# Altium PCB main.PcbDoc
Units mm, origin at the board's own origin, x right, y up, seen from the top; angles counter-clockwise.
Board outline 241.1 x 65 mm, 2 copper layers (Top Layer, Bottom Layer); 26 components, 20 nets, 89 pads, 10 vias.
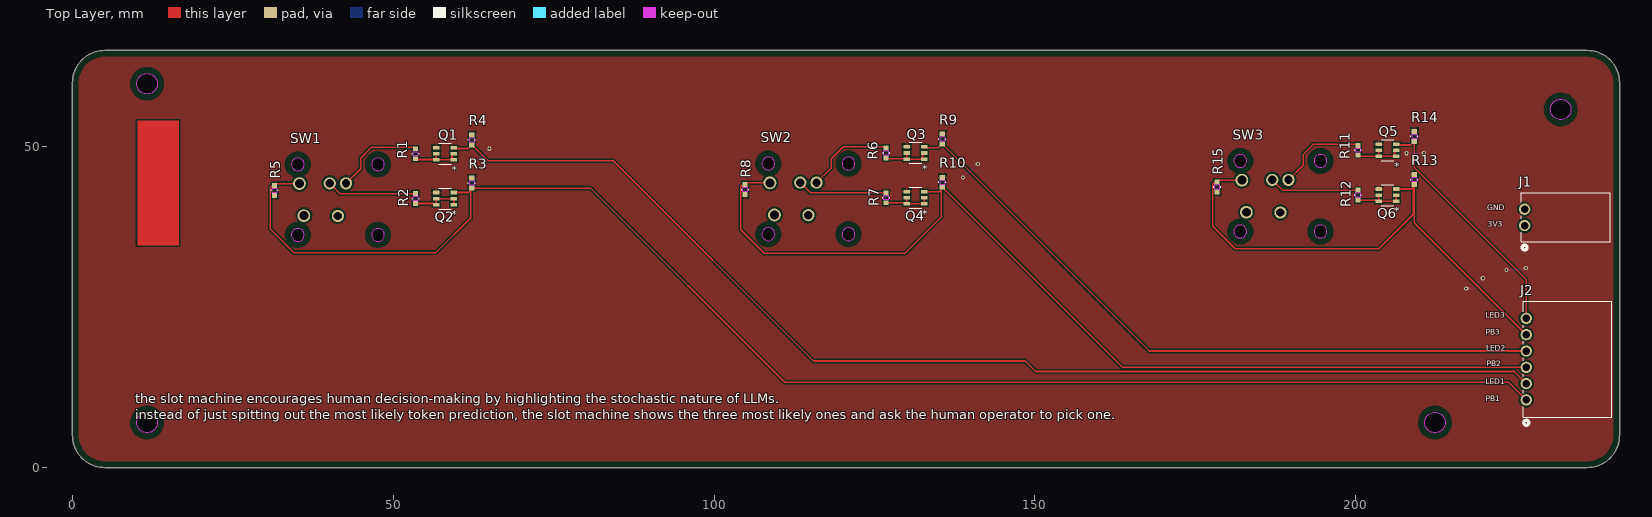
[diagram p0: Top Layer view]
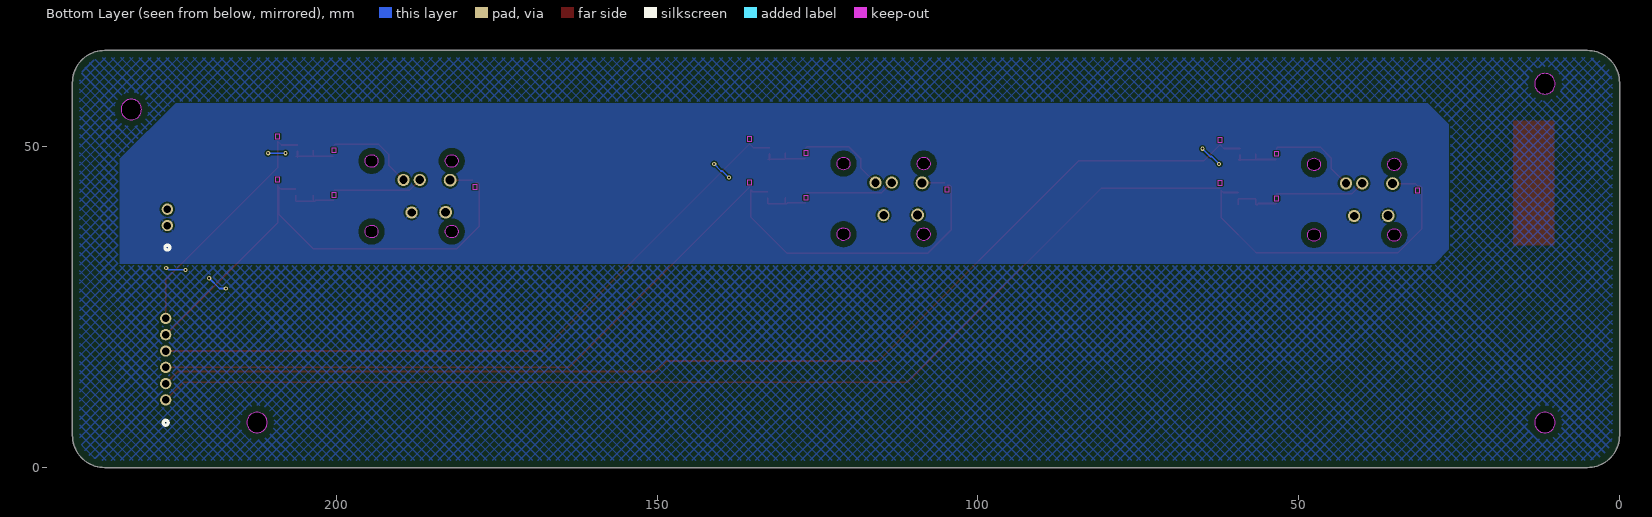
[diagram p1: Bottom Layer view, seen from below]
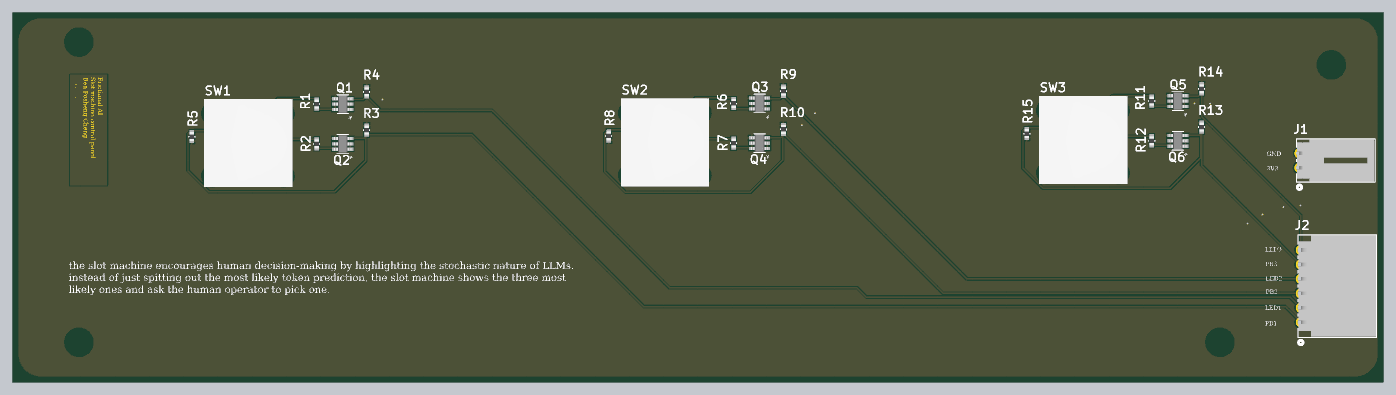
[diagram p2: 3D render of the assembled board from above, using the file's embedded part models]

## Layer stack, top to bottom
Top Solder: solder mask 0.0102, Solder Resist, Dk 3.5
Top Layer: signal copper 0.0356
Dielectric 1: dielectric 0.32, FR-4, Dk 4.8
Bottom Layer: signal copper 0.0356
Bottom Solder: solder mask 0.0102, Solder Resist, Dk 3.5

## Board outline
0,5 0,60 cw(c5,60) 5,65 236.1,65 cw(c236.1,60) 241.1,60 241.1,5 cw(c236.1,5) 236.1,0 5,0 cw(c5,5)
cut-out: 231.931,54.212 cw(c231.931,55.812) 230.331,55.812 cw(c231.931,55.812) 231.931,57.412 cw(c231.931,55.812) 233.531,55.812 cw(c231.931,55.812)
cut-out: 11.631,58.212 cw(c11.631,59.812) 10.031,59.812 cw(c11.631,59.812) 11.631,61.412 cw(c11.631,59.812) 13.231,59.812 cw(c11.631,59.812)
cut-out: 212.331,5.412 cw(c212.331,7.012) 210.731,7.012 cw(c212.331,7.012) 212.331,8.612 cw(c212.331,7.012) 213.931,7.012 cw(c212.331,7.012)
cut-out: 11.631,5.412 cw(c11.631,7.012) 10.031,7.012 cw(c11.631,7.012) 11.631,8.612 cw(c11.631,7.012) 13.231,7.012 cw(c11.631,7.012)

## Design rules (kind name [scope] priority, off if disabled: settings)
BoardOutlineClearance [All] p1: gap=1 ignorepadtopadclearanceinfootprint=FALSE
Clearance [All] p1: gap=0.2 ignorepadtopadclearanceinfootprint=TRUE except(0.1: Track-Track Track-SMDPad; 0.15: SMDPad-SMDPad; 0.28: Track-THPad Track-Hole; 0.3: THPad-Fill THPad-Poly THPad-Region; 0.45: THPad-THPad)
HoleSize [All] p1: absolutevalues=TRUE maxlimit=6.3 minlimit=0.15 maxpercent=80.000 minpercent=20.000
MinimumAnnularRing [not isvia] p1: minimumring=0.3
MinimumSolderMaskSliver [All] p1: minsoldermaskwidth=0.1
PlaneClearance [All] p1: clearance=0.3
PlaneConnect [All] p1: pad.planeconnectstyle=Relief pad.reliefexpansion=0.2 pad.reliefentries=4 pad.reliefconductorwidth=0.3 pad.reliefairgap=0.3 via.planeconnectstyle=Direct via.reliefexpansion=0.508 via.reliefentries=4 via.reliefconductorwidth=0.254 via.reliefairgap=0.254
PolygonConnect [All] p1: thpad.connectstyle=Relief thpad.reliefconductorwidth=0.254 thpad.reliefentries=4 thpad.polygonreliefangle="90 Angle" thpad.airgapwidth=0.254 thpad.conductorbypadedge=TRUE thpad.mindistance=0.381 thpad.enablemindistance=FALSE smdpad.connectstyle=Relief smdpad.reliefconductorwidth=0.254 smdpad.reliefentries=4 smdpad.polygonreliefangle="90 Angle" smdpad.airgapwidth=0.254 smdpad.conductorbypadedge=TRUE smdpad.mindistance=0.381 smdpad.enablemindistance=FALSE via.connectstyle=Direct via.reliefconductorwidth=0.254 via.reliefentries=4 via.polygonreliefangle="90 Angle" via.airgapwidth=0.254
RoomDefinition PushButton3 [InComponentClass('PushButton3')] p1: confinementstyle=ConfineIn formatcopy=TRUE lockcomponents=FALSE outline 210.211,53.381 177.318,53.381 177.318,34.458 210.211,34.458
RoomDefinition PushButton2 [InComponentClass('PushButton2')] p2: confinementstyle=ConfineIn formatcopy=TRUE lockcomponents=FALSE outline 136.562,52.968 103.796,52.968 103.796,34.045 136.562,34.045
RoomDefinition PushButton1 [InComponentClass('PushButton1')] p3: confinementstyle=ConfineIn formatcopy=TRUE lockcomponents=FALSE outline 30.486,34.043 63.379,34.043 63.379,52.839 30.486,52.839
RoutingVias [All] p1: holewidth=0.33 width=0.66 viastyle="Through Hole" minholewidth=0.3 minwidth=0.5 maxholewidth=0.45 maxwidth=1.27
SilkToSilkClearance [All] p1: silktosilkclearance=0
SilkToSolderMaskClearance [IsPad] p1: minsilkscreentomaskgap=0.15 clearancetoexposedcopper=FALSE
SolderMaskExpansion SolderMaskExpansionVia [IsVia] p1: expansion=0 istentingtop=TRUE
SolderMaskExpansion [All] p2: expansion=0.05 istentingtop=FALSE
SupplyNets "Schematic Supply Nets_3" [InNet('3V3')] p1: voltage=0.000
SupplyNets "Schematic Supply Nets" [InNet('GND')] p2: voltage=0.000
Width [All] p1: maxlimit=1 minlimit=0.1 preferedwidth=0.2
24 further rules are at their usual default settings.

## Classes and differential pairs
component class PushButton3: Q5 Q6 R11 R12 R13 R14 R15 SW3
component class PushButton2: Q3 Q4 R6 R7 R8 R9 R10 SW2
component class PushButton1: Q1 Q2 R1 R2 R3 R4 R5 SW1

## Components (designator, comment, footprint, x,y, rotation, side; value= is the part's Value field where it differs from the comment)
J1 "705530001" CONN_705530001_02_MOL 226.314,37.719 r90 top
J2 "705530110" CONN_705530005_06_MOL 226.568,10.541 r90 top
Q1 "STT6N3LLH6" SOT_6N3LLH6_STM 58.045,48.902 r180 top
Q2 "STT6N3LLH6" SOT_6N3LLH6_STM 58.045,41.917 r180 top
Q3 "STT6N3LLH6" SOT_6N3LLH6_STM 131.372,49.025 r180 top
Q4 "STT6N3LLH6" SOT_6N3LLH6_STM 131.372,42.04 r180 top
Q5 "STT6N3LLH6" SOT_6N3LLH6_STM 204.925,49.442 r180 top
Q6 "STT6N3LLH6" SOT_6N3LLH6_STM 204.925,42.457 r180 top
R1 "55" RC0603N_YAG 53.473,48.902 r90 top
R2 "55" RC0603N_YAG 53.473,41.917 r90 top
R3 "10k" RC0603N_YAG 62.236,44.33 r90 top
R4 "10k" RC0603N_YAG 62.236,51.061 r90 top
R5 "10k" RC0603N_YAG 31.502,43.187 r270 top
R6 "55" RC0603N_YAG 126.8,49.025 r90 top
R7 "55" RC0603N_YAG 126.8,42.04 r90 top
R8 "10k" RC0603N_YAG 104.829,43.31 r270 top
R9 "10k" RC0603N_YAG 135.563,51.184 r90 top
R10 "10k" RC0603N_YAG 135.563,44.453 r90 top
R11 "55" RC0603N_YAG 200.353,49.442 r90 top
R12 "55" RC0603N_YAG 200.353,42.457 r90 top
R13 "10k" RC0603N_YAG 209.116,44.87 r90 top
R14 "10k" RC0603N_YAG 209.116,51.601 r90 top
R15 "10k" RC0603N_YAG 178.382,43.727 r270 top
SW1 "LP6OA1ASRY" LP6 34.114,35.247 r0 top
SW2 "LP6OA1ASRY" LP6 107.441,35.37 r0 top
SW3 "LP6OA1ASRY" LP6 180.995,35.787 r0 top

## Footprints (in the part's own frame and the unit in brackets; to place one, negate y for a bottom-side part, rotate by r counter-clockwise, add the part's x,y. Pads: shape width x height; smd on the part's side, far side on the other; paste and mask are expansions set on the pad)
CONN_705530001_02_MOL [mil]
  round 69.61 / inner round 60 / far side round 69.61 hole 46 paste-99999 mask+0: 1(0,0) 2(100,0)
  silkscreen extent -150,-525 200,20, body extent -95,-520 195,15, height 272
CONN_705530005_06_MOL [mil]
  round 69.61 hole 46 paste-99999 mask+0: 1(0,0) 2(100,0) 3(200,0) 4(300,0) 5(400,0) 6(500,0)
  silkscreen extent -155,-525 605,20, body extent -100,-520 600,15, height 272
LP6 [mm]
  round 2 hole 1.4: 1(1.25,9) 2(1.95,4)
  round 1.9 hole 1.3: L1(8.52,9.04) L2(5.98,9.04) LC(7.25,3.96)
  Keep-Out Layer board cut-out: 0,1 0.076,0.617 0.293,0.293 0.617,0.076 1,0 1,0 1.383,0.076 1.707,0.293 1.924,0.617 2,1 2,1 1.924,1.383 1.707,1.707 1.383,1.924 1,2 1,2 0.617,1.924 0.293,1.707 0.076,1.383 0,1
  Keep-Out Layer board cut-out: 12.5,1 12.576,0.617 12.793,0.293 13.117,0.076 13.5,0 13.5,0 13.883,0.076 14.207,0.293 14.424,0.617 14.5,1 14.5,1 14.424,1.383 14.207,1.707 13.883,1.924 13.5,2 13.5,2 13.117,1.924 12.793,1.707 12.576,1.383 12.5,1
  Keep-Out Layer board cut-out: 12.5,12 12.576,11.617 12.793,11.293 13.117,11.076 13.5,11 13.5,11 13.883,11.076 14.207,11.293 14.424,11.617 14.5,12 14.5,12 14.424,12.383 14.207,12.707 13.883,12.924 13.5,13 13.5,13 13.117,12.924 12.793,12.707 12.576,12.383 12.5,12
  Keep-Out Layer board cut-out: 0,12 0.076,11.617 0.293,11.293 0.617,11.076 1,11 1,11 1.383,11.076 1.707,11.293 1.924,11.617 2,12 2,12 1.924,12.383 1.707,12.707 1.383,12.924 1,13 1,13 0.617,12.924 0.293,12.707 0.076,12.383 0,12
  body extent -0.45,-0.95 15.05,14.55, height 19.7
RC0603N_YAG [mil]
  rect 30x32 smd paste+0 mask+0: 1(-30.5,0) 2(30.5,0)
  Top Layer keep-out region: -13.5,-14 -13.5,14 13.5,14 13.5,-14
  Keep-Out Layer region: -13.5,-14 -13.5,14 13.5,14 13.5,-14
  silkscreen extent -3,-21 3,21, body extent -31,-16 31,16, height 28
SOT_6N3LLH6_STM [mm]
  rect 0.985x0.558 smd paste+0 mask+0: 1(-1.356,0.95) 2(-1.356,0) 3(-1.356,-0.95) 4(1.356,-0.95) 5(1.356,0) 6(1.356,0.95)
  silkscreen extent -0.99,-1.64 0.99,1.64, body extent -1.5,-1.51 1.5,1.51, height 1.25

## Part data
J1: "2.54mm Pitch SL Header, Low Profile, Single Row, Right Angle, 3.05mm Pocket, Shrouded, 2 Circuits, 0.38Âµm Gold (Au) Selective Plating, Tin (Sn) PC Tail Plating", Manufacturer_Name="Molex Connector Corporation", Copyright="Copyright (C) 2025 Ultra Librarian. All rights reserved.", Manufacturer_Part_Number=705530001, RefDes=RefDes, Type=Type
J2: "2.54mm Pitch SL Header, Low Profile, Single Row, Right Angle, 3.05mm Pocket, Shrouded, 6 Circuits, 0.38Âµm Gold (Au) Selective Plating, Tin (Sn) PC Tail Plating", Manufacturer_Name="Molex Connector Corporation", Copyright="Copyright (C) 2025 Ultra Librarian. All rights reserved.", Manufacturer_Part_Number=705530110, RefDes=RefDes, Type=Type
Q1 Q2 Q3 Q4 Q5 Q6: "N-channel 30 V, 0.021 Ohm, 6 A STripFET(TM) VI DeepGATE(TM) Power MOSFET in SOT23-6L package", Manufacturer_Name=STMicroelectronics, Copyright="Copyright (C) 2026 Ultra Librarian. All rights reserved.", Manufacturer_Part_Number=STT6N3LLH6, RefDes=RefDes, Type=Type
R1 R2 R6 R7 R11 R12: library part "0603 55Ohm", "55 OHM 0.1% 1/10W 0603", Manufacturer_Name=Yageo, Copyright="Copyright (C) 2026 Ultra Librarian. All rights reserved.", Manufacturer_Part_Number="0603 55Ohm"
R3 R4 R5 R8 R9 R10 R13 R14 R15: library part RT0603BRD0710KL, "10K OHM 0.1% 1/10W 0603", Manufacturer_Name=Yageo, Copyright="Copyright (C) 2026 Ultra Librarian. All rights reserved.", Manufacturer_Part_Number=RT0603BRD0710KL
SW1 SW2 SW3: "LP6 Series Illuminated Pushbutton Switch Momentary SPST Red/Yellow", Manufacturer_Part_Number=LP6OA1ASRY

## Via types
v1: diameter 0.66, hole 0.33, Top Layer to Bottom Layer, tented both sides, 10 vias

## Nets (pads, with @x,y where several pads share a name; then routed paths per layer and width w, separated by ;. In a path a pad name is that pad's centre, name@x,y a point inside that pad or via, vN(x,y) a via of type N, cw(c..) or ccw(c..) an arc to the next point about the centre after c; other vN are vias at no path point)
3V3: J1.1 SW1.2 SW1.LC SW2.2 SW2.LC SW3.2 SW3.LC
GND: J1.2 Q1.4 Q2.4 Q3.4 Q4.4 Q5.4 Q6.4 R3.2 R4.2 R5.2 R8.2 R9.2 R10.2 R13.2 R14.2 R15.2 | length 15.9
  Bottom Layer w0.254: v1(62.4,47.3) 63.573,48.473 63.773,48.473 v1(65,49.7) ; v1(138.8,45.2) 139.823,46.223 140.023,46.223 v1(141.1,47.3) ; v1(207.9,49) v1(210.6,49) ; v1(217.2,27.9) 218.2,27.9 v1(219.8,29.5) ; v1(223.5,30.8) 226.09,30.8 226.39,31.1 v1(226.5,31.1)
led1: J2.2 Q1.3 R4.1 | length 183.1
  Top Layer w0.254: Q1.3@59.147,49.725 61.649,49.725 62.211,50.286 R4.1 62.261,50.286 64.747,47.8 84.3,47.8 115.5,16.6 148.5,16.6 150.123,14.977 224.672,14.977 J2.2
led2: J2.4 Q3.3 R9.1 | length 107.7
  Top Layer w0.254: Q3.3@132.474,49.848 134.976,49.848 R9.1@135.538,50.41 ; R9.1 135.588,50.41 167.837,18.161 J2.4
led3: J2.6 Q5.3 R14.1 | length 38.1
  Top Layer w0.254: Q5.3@206.028,50.265 208.53,50.265 R14.1@209.091,50.826 ; R14.1 209.116,46.753 226.568,29.301 J2.6
NetQ1_1: Q1.1 Q1.2 Q1.5 Q1.6 R1.1 | length 7.7
  Top Layer w0.254: R1.1@53.6,48 56.641,48 Q1.6 ; Q1.5 Q1.6 ; Q1.1@59.147,47.825 Q1.2@59.147,48.775 ; Q1.1 Q1.6
NetQ2_1: Q2.1 Q2.2 Q2.5 Q2.6 R2.1 | length 7.9
  Top Layer w0.254: R2.1 56.3,41.142 56.475,40.967 Q2.6 Q2.5 Q2.2 Q2.1
NetQ3_1: Q3.1 Q3.2 Q3.5 Q3.6 R6.1 | length 7.7
  Top Layer w0.254: R6.1@126.927,48.124 Q3.6@129.968,48.124 ; Q3.5 Q3.6 Q3.1 ; Q3.1@132.474,47.948 Q3.2@132.474,48.898
NetQ4_1: Q4.1 Q4.2 Q4.5 Q4.6 R7.1 | length 7.9
  Top Layer w0.254: R7.1 129.627,41.266 129.802,41.09 Q4.6 ; Q4.5 Q4.6 ; Q4.2 Q4.1 Q4.6
NetQ5_1: Q5.1 Q5.2 Q5.5 Q5.6 R11.1 | length 7.7
  Top Layer w0.254: R11.1@200.48,48.54 Q5.6@203.521,48.54 ; Q5.5 Q5.6 Q5.1 ; Q5.1@206.028,48.365 Q5.2@206.028,49.315
NetQ6_1: Q6.1 Q6.2 Q6.5 Q6.6 R12.1 | length 7.9
  Top Layer w0.254: R12.1 203.181,41.682 203.356,41.507 Q6.6 ; Q6.5 Q6.6 ; Q6.2 Q6.1 Q6.6
NetR1_2: R1.2 SW1.L1 | length 14.2
  Top Layer w0.254: SW1.L1 44.92,46.572 44.92,48.22 46.6,49.9 53.249,49.9 R1.2
NetR2_2: R2.2 SW1.L2 | length 14
  Top Layer w0.254: SW1.L2 41.69,42.691 R2.2
NetR6_2: R6.2 SW2.L1 | length 14.1
  Top Layer w0.254: SW2.L1 118.247,46.696 118.247,48.147 120.1,50 126.6,50 R6.2
NetR7_2: R7.2 SW2.L2 | length 14
  Top Layer w0.254: SW2.L2 115.017,42.815 R7.2
NetR11_2: R11.2 SW3.L1 | length 14.2
  Top Layer w0.254: SW3.L1 191.8,47.112 191.8,48.8 193.4,50.4 200.17,50.4 R11.2
NetR12_2: R12.2 SW3.L2 | length 14
  Top Layer w0.254: SW3.L2 188.57,43.231 R12.2
pb1: J2.1 Q2.3 R3.1 R5.1 SW1.1 | length 231.3
  Top Layer w0.254: R5.1 31.397,43.857 31.011,43.857 30.819,43.665 30.819,37.181 34.5,33.5 56.646,33.5 62.084,38.937 62.084,43.174 61.776,42.867 Q2.3 ; R5.1@31.527,43.961 31.813,44.247 SW1.1 ; R3.1 80.745,43.555 111,13.3 223.809,13.3 J2.1
pb2: J2.3 Q4.3 R8.1 R10.1 SW2.1 | length 155.7
  Top Layer w0.254: R8.1@104.724,43.98 104.338,43.98 104.146,43.789 104.146,37.054 107.8,33.4 129.75,33.4 135.411,39.061 135.411,43.298 135.103,42.99 Q4.3 ; R8.1@105.14,44.37 SW2.1 ; R10.1 135.588,43.679 163.646,15.621 J2.3
pb3: J2.5 Q6.3 R13.1 R15.1 SW3.1 | length 83.4
  Top Layer w0.254: R15.1@178.278,44.397 177.891,44.397 177.7,44.205 177.7,37.6 181.2,34.1 203.587,34.1 208.964,39.477 208.964,43.714 208.657,43.407 Q6.3 ; R15.1@178.693,44.787 SW3.1 ; R13.1 209.116,38.153 J2.5

## Polygon pours and split planes (outlines as drawn)
GND on Top Layer "GNDTOP" (solid, pour order 1): 0,65.2 2.8,68 241.5,68 241.5,4 245.5,0 0,0
no net on Bottom Layer "BALANCEBTM" (hatched 45Degree grid 1 track 0.254, pour order 2): 0,68.7 0.4,69.1 243.2,69.1 243.2,2.5 245.7,0 0,0
3V3 on Bottom Layer "3V3BTM" (solid, pour order 0): 26.6,53.5 29.9,56.8 225,56.8 233.7,48.1 233.7,31.8 28.8,31.8 26.6,34

## Other copper
Top Layer:
  rectangle: 10.1,34.6 16.6,54.1

## Silkscreen, mask and mechanical layers (free items; w line width, h text height)
Top Overlay:
  text "GND" at 220.522,39.813 h1.5
  text "3V3" at 220.534,37.213 h1.5
  text "LED3" at 220.252,23.013 h1.5
  text "PB3" at 220.28,20.413 h1.5
  text "LED2" at 220.352,17.9 h1.5
  text "PB2" at 220.38,15.5 h1.5
  text "LED1" at 220.252,12.7 h1.5
  text "PB1" at 220.28,10 h1.5
  text "the slot machine encourages human decision-making by highlighting the stochastic nature of LLMs. / instead of just spitting out the most likely token prediction, the slot machine shows the three most likely ones and ask the human operator to pick one." at 9.8,6.963 h2.5
Top Solder:
  text "Frictional AI / Slot machine control panel / Ben Posheng Cheng" at 12.214,53.7 h1.5 r270
  text "鄭" at 10.901,52.305 h1.5
  text "泊" at 10.901,51.184 h1.5
  text "聲" at 10.9,50.11 h1.5
Mechanical 1:
  drawing of 476 lines, arcs and shapes, not listed
Board Shape:
  lines w0.1: 0,5 ccw(c5,5) 5,0 236.1,0 ccw(c236.1,5) 241.1,5 241.1,60 ccw(c236.1,60) 236.1,65 5,65 ccw(c5,60) 0,60 0,5 ; 10.031,7.012 cw(c11.631,7.012) 11.631,8.612 cw(c11.631,7.012) 13.231,7.012 cw(c11.631,7.012) 11.631,5.412 cw(c11.631,7.012) 10.031,7.012 ; 10.031,59.812 cw(c11.631,59.812) 11.631,61.412 cw(c11.631,59.812) 13.231,59.812 cw(c11.631,59.812) 11.631,58.212 cw(c11.631,59.812) 10.031,59.812 ; 34.114,36.247 cw(c35.114,36.247) 35.114,37.247 cw(c35.114,36.247) 36.114,36.247 cw(c35.114,36.247) 35.114,35.247 cw(c35.114,36.247) 34.114,36.247 ; 34.114,47.247 cw(c35.114,47.247) 35.114,48.247 cw(c35.114,47.247) 36.114,47.247 cw(c35.114,47.247) 35.114,46.247 cw(c35.114,47.247) 34.114,47.247 ; 46.614,36.247 cw(c47.614,36.247) 47.614,37.247 cw(c47.614,36.247) 48.614,36.247 cw(c47.614,36.247) 47.614,35.247 cw(c47.614,36.247) 46.614,36.247 ; 46.614,47.247 cw(c47.614,47.247) 47.614,48.247 cw(c47.614,47.247) 48.614,47.247 cw(c47.614,47.247) 47.614,46.247 cw(c47.614,47.247) 46.614,47.247 ; 107.441,36.37 cw(c108.441,36.37) 108.441,37.37 cw(c108.441,36.37) 109.441,36.37 cw(c108.441,36.37) 108.441,35.37 cw(c108.441,36.37) 107.441,36.37 ; 107.441,47.37 cw(c108.441,47.37) 108.441,48.37 cw(c108.441,47.37) 109.441,47.37 cw(c108.441,47.37) 108.441,46.37 cw(c108.441,47.37) 107.441,47.37 ; 119.941,36.37 cw(c120.941,36.37) 120.941,37.37 cw(c120.941,36.37) 121.941,36.37 cw(c120.941,36.37) 120.941,35.37 cw(c120.941,36.37) 119.941,36.37 ; 119.941,47.37 cw(c120.941,47.37) 120.941,48.37 cw(c120.941,47.37) 121.941,47.37 cw(c120.941,47.37) 120.941,46.37 cw(c120.941,47.37) 119.941,47.37 ; 180.995,36.787 cw(c181.995,36.787) 181.995,37.787 cw(c181.995,36.787) 182.995,36.787 cw(c181.995,36.787) 181.995,35.787 cw(c181.995,36.787) 180.995,36.787 ; 180.995,47.787 cw(c181.995,47.787) 181.995,48.787 cw(c181.995,47.787) 182.995,47.787 cw(c181.995,47.787) 181.995,46.787 cw(c181.995,47.787) 180.995,47.787 ; 193.495,36.787 cw(c194.495,36.787) 194.495,37.787 cw(c194.495,36.787) 195.495,36.787 cw(c194.495,36.787) 194.495,35.787 cw(c194.495,36.787) 193.495,36.787 ; 193.495,47.787 cw(c194.495,47.787) 194.495,48.787 cw(c194.495,47.787) 195.495,47.787 cw(c194.495,47.787) 194.495,46.787 cw(c194.495,47.787) 193.495,47.787 ; 210.731,7.012 cw(c212.331,7.012) 212.331,8.612 cw(c212.331,7.012) 213.931,7.012 cw(c212.331,7.012) 212.331,5.412 cw(c212.331,7.012) 210.731,7.012 ; 230.331,55.812 cw(c231.931,55.812) 231.931,57.412 cw(c231.931,55.812) 233.531,55.812 cw(c231.931,55.812) 231.931,54.212 cw(c231.931,55.812) 230.331,55.812

## Text inside footprints (layer, text, board x,y; h text height)
Q1: Top Overlay "*" at 59.973,47.521 h1.27 r180; Mechanical 13 "*" at 58.845,48.737 h1.27 r180
Q2: Top Overlay "*" at 59.973,40.536 h1.27 r180; Mechanical 13 "*" at 58.845,41.752 h1.27 r180
Q3: Top Overlay "*" at 133.3,47.644 h1.27 r180; Mechanical 13 "*" at 132.172,48.86 h1.27 r180
Q4: Top Overlay "*" at 133.3,40.659 h1.27 r180; Mechanical 13 "*" at 132.172,41.875 h1.27 r180
Q5: Top Overlay "*" at 206.853,48.061 h1.27 r180; Mechanical 13 "*" at 205.726,49.277 h1.27 r180
Q6: Top Overlay "*" at 206.853,41.076 h1.27 r180; Mechanical 13 "*" at 205.726,42.292 h1.27 r180